# EAGLE board PCB_2D (EAGLE 9.7.0)
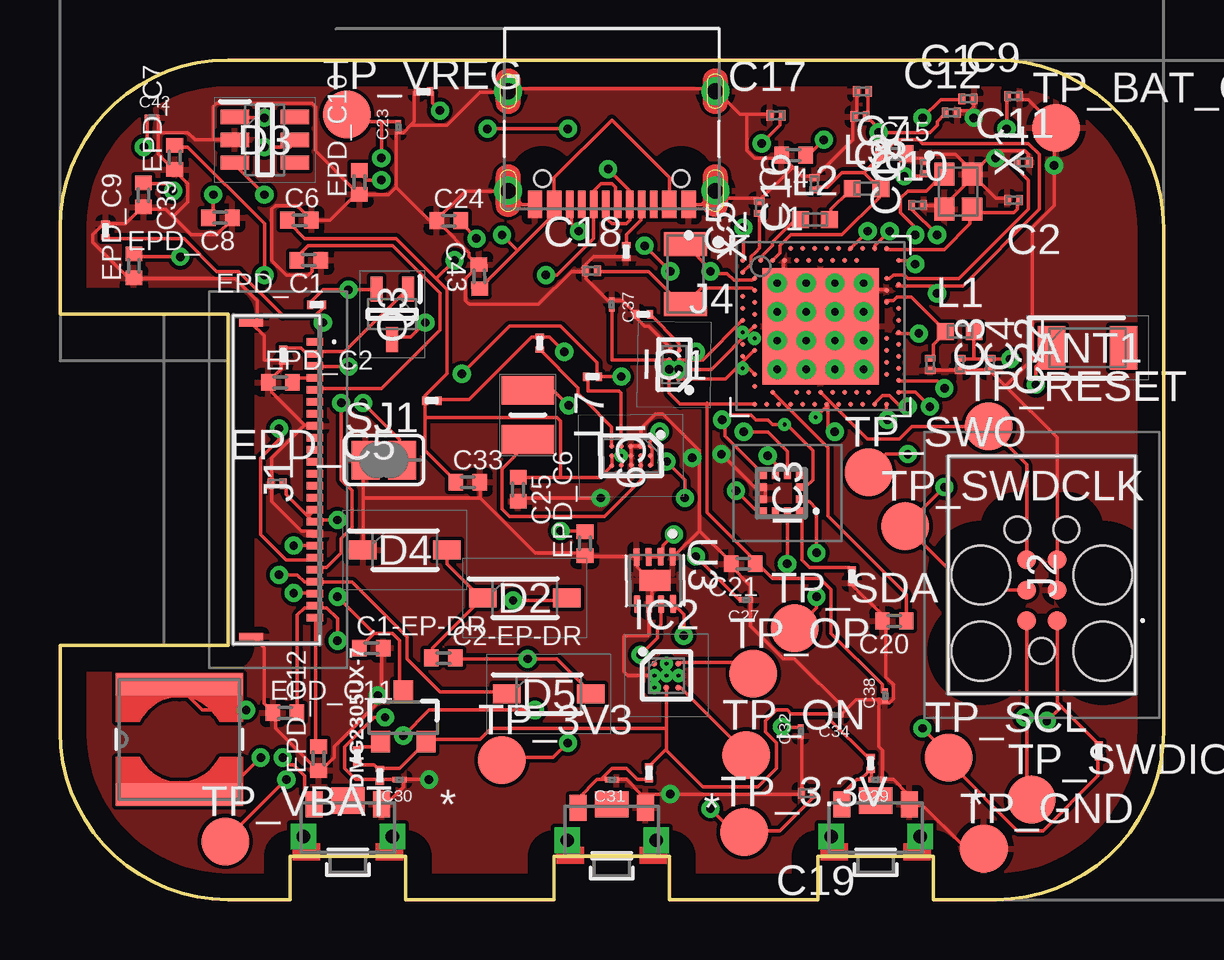
[diagram p0: board, top side]
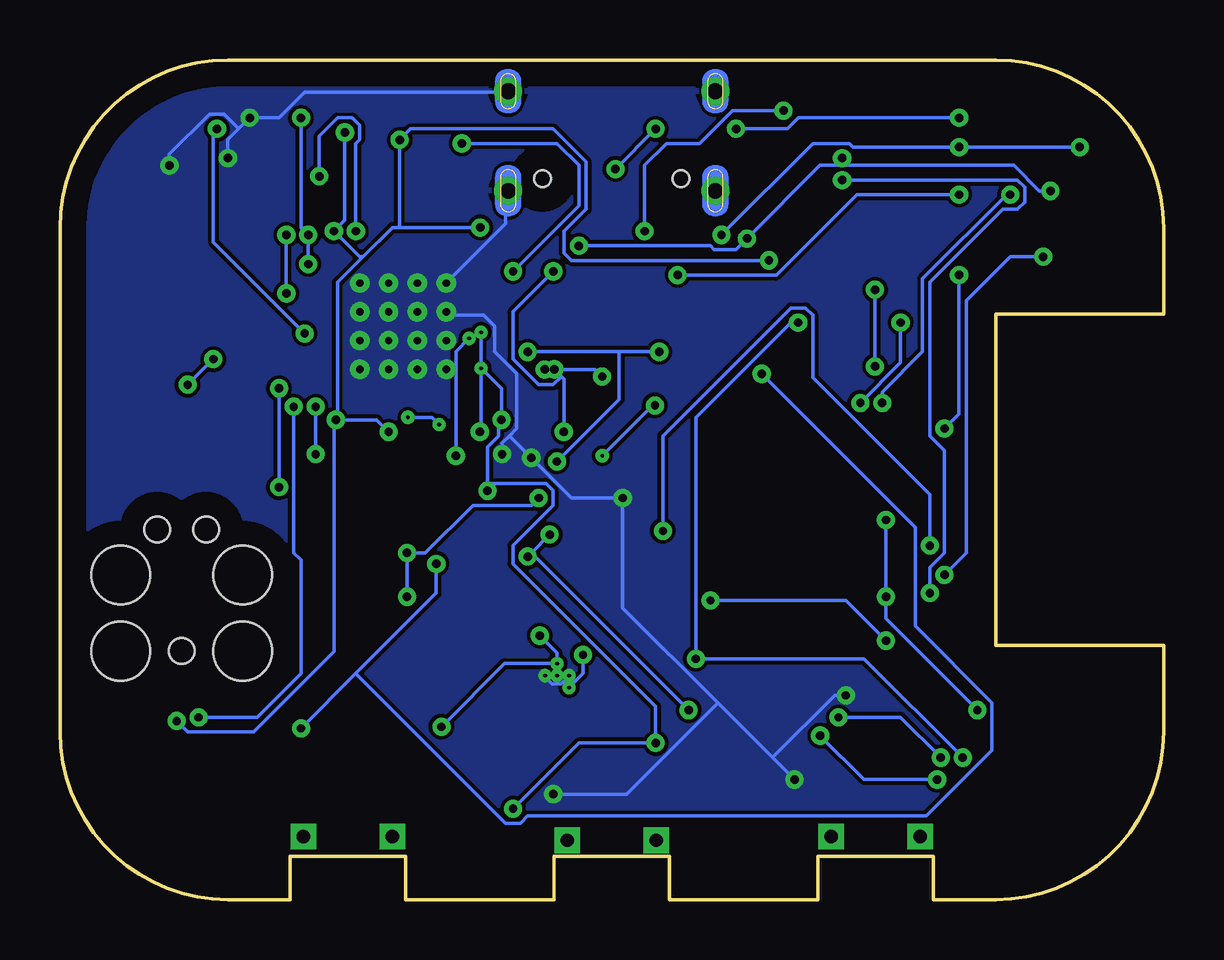
[diagram p1: board, bottom side, seen from below]

Size 46 x 35 mm. Coordinates in mm from the lower left corner, seen from the top.
Outline: 46,7 46,28
Outline: 46,28 arc90 39,35 37.7,35 7,35 arc90 0,28 0,24.4 7,24.4 7,10.6 0,10.6 0,7 arc90 7,0 9.6,0 9.6,1.8 14.4,1.8 14.4,0 20.6,0 20.6,1.8 25.4,1.8 25.4,0 31.6,0 31.6,1.8 36.4,1.8 36.4,0 37.7,0 39,0 arc90 46,7
Outline: 46,28 46,7
Copper layers (1*16): Top 0.035mm / dielectric 1.5mm / Bottom 0.035mm
Design rules "jlcpcb-2layers.dru": minimum track width 6mil, minimum drill 0.35mm, track to track 6mil, track to pad 6mil, pad to pad 6mil, via to via 6mil, smd to smd 6mil, copper to edge 40mil, drill to drill 6mil, minimum pad ring 10mil, minimum via ring 8mil, stop-mask expansion 4mil, vias tented up to drill 9999mil, thermal gap 10mil

## Footprints (pad centres in the part's own frame; a part is rotated, then mirrored left to right if it is on the bottom)
2450AT18B100E_ANTC3216X140N = smd 1.15 x 1.8: 1 -1.5,0; 2 1.5,0
NORDIC_NRF_3_RESC0201_L = smd 0.28 x 0.43: 1 -0.255,0; 2 0.255,0
PERFECT_0402_0402 = smd 0.6 x 0.7: 1 -0.5,0; 2 0.5,0
GRM011R60J152KE01L_2_CAPC0201X13N = smd 0.22 x 0.23: 1 -0.185,0; 2 0.185,0
ESP32_C6_LIBRARY_5_SOD3716X135N = smd 1.15 x 0.8: 1 -1.75,0; 2 1.75,0
ESP32_C6_LIBRARY_3_SOT95P280X145-6N = smd 1.2 x 0.6: 1 -1.25,0.95; 2 -1.25,0; 3 -1.25,-0.95; 4 1.25,-0.95; 5 1.25,0; 6 1.25,0.95
ESP32_C6_LIBRARY_4_ESP32_C6_LIBRARY_4_ESP32_C6_LIBRARY_4_ESP32_C6_LIBRARY_4_ESP32_WROVER_SPARKFUN-DISCRETESEMI_SOT23-3 = smd 0.8 x 0.9: 1 -0.95,-1; 2 0.95,-1; 3 0,1.1
BQ25180YBGR_BGA8C40P2X4_100X155X50 = smd 0.2 x 0.2: A1 -0.2,0.6; A2 0.2,0.6; B1 -0.2,0.2; B2 0.2,0.2; C1 -0.2,-0.2; C2 0.2,-0.2; D1 -0.2,-0.6; D2 0.2,-0.6
DRV2605YZFR_BGA9C50P3X3_144X144X62 = smd 0.25 x 0.25: A1 -0.5,0.5; A2 0,0.5; A3 0.5,0.5; B1 -0.5,0; B2 0,0; B3 0.5,0; C1 -0.5,-0.5; C2 0,-0.5; C3 0.5,-0.5
BMA423_BMA423 = smd 0.3 x 0.35: 1 -0.75,-0.775; 2 -0.25,-0.775; 3 0.25,-0.775; 4 0.75,-0.775; 7 0.75,0.775; 8 0.25,0.775; 9 -0.25,0.775; 10 -0.75,0.775 | smd 0.35 x 0.3: 5 0.775,-0.25; 6 0.775,0.25; 11 -0.775,0.25; 12 -0.775,-0.25
RT6160AWSC_BGA15C40P3X5_140X230X60 = smd 0.216 x 0.216: A1 -0.4,0.8; A2 0,0.8; A3 0.4,0.8; B1 -0.4,0.4; B2 0,0.4; B3 0.4,0.4; C1 -0.4,0; C2 0,0; C3 0.4,0; D1 -0.4,-0.4; D2 0,-0.4; D3 0.4,-0.4; E1 -0.4,-0.8; E2 0,-0.8; E3 0.4,-0.8
503480-2400_5034802400 = smd 0.3 x 0.7: 1 -5.75,1.525; 2 -5.25,1.525; 3 -4.75,1.525; 4 -4.25,1.525; 5 -3.75,1.525; 6 -3.25,1.525; 7 -2.75,1.525; 8 -2.25,1.525; 9 -1.75,1.525; 10 -1.25,1.525; 11 -0.75,1.525; 12 -0.25,1.525; 13 0.25,1.525; 14 0.75,1.525; 15 1.25,1.525; 16 1.75,1.525; 17 2.25,1.525; 18 2.75,1.525; 19 3.25,1.525; 20 3.75,1.525; 21 4.25,1.525; 22 4.75,1.525; 23 5.25,1.525; 24 5.75,1.525 | smd 0.3 x 1: MP1 -6.54,-1.125; MP2 6.54,-1.125
TC2030-IDC_TC2030IDC = smd 0.783 x 0.783: 1 -0.953,-0.635; 2 -0.953,0.635; 3 0.317,-0.635; 4 0.317,0.635; 5 1.588,-0.635; 6 1.588,0.635 | hole 2.451: -2.223,-2.54; -2.223,2.54; 0.952,-2.54; 0.952,2.54 | hole 1.067: -2.223,0; 2.857,-1.016; 2.857,1.016
KH-TYPE-C-16P_KINGHELM_KH-TYPE-C-16P = smd 0.6 x 1.15: A1_B12 -3.2,4.725; A4_B9 -2.4,4.725; A9_B4 2.4,4.725; A12_B1 3.2,4.725 | smd 0.3 x 1.15: A5 -1.25,4.725; A6 -0.25,4.725; A7 0.25,4.725; A8 1.25,4.725; B5 1.75,4.725; B6 0.75,4.725; B7 -0.75,4.725; B8 -1.75,4.725 | drill 0.65 pad 1.05: SH1 -4.32,0; SH2 4.32,0; SH3 -4.32,4.15; SH4 4.32,4.15 | hole 0.7: -2.89,3.65; 2.89,3.65
NORDIC_NRF_2_RESC0402_M = smd 0.7 x 0.7: 1 -0.6,0; 2 0.6,0
ESP32_C6_LIBRARY_2_IND_4828-WE-TPC_WRE = smd 0.9 x 5.3: 1 -2.286,0; 2 2.286,0
MLP2016SR47MT0S1_INDC2016X100N = smd 1.2 x 2.2: 1 -1.028,0; 2 1.028,0
ESP32_C6_LIBRARY_6_SOT65P210X110-3N = smd 1.05 x 0.5: 1 -1.05,0.65; 2 -1.05,-0.65; 3 1.05,0
ERA-1AEB3401C_0201 = smd 0.35 x 0.25: 1 0,0.275; 2 0,-0.275
CPF0201D7K68C1_0201 = smd 0.35 x 0.25: 1 0,0.275; 2 0,-0.275
ESP32_C6_LIBRARY_7_JUMPER_SJ = smd 1.168 x 1.6: 1 -0.762,0; 2 0.762,0
2025-10-22_07-23-44_LIBRARY_SW_EVP-AKE31A_PAN = smd 0.711 x 1.092: 1 -1.4,-0.972; 2 1.4,-0.972 | drill 0.559 pad 0.914 square: 3 -1.848,0.381; 4 1.848,0.381 | smd 1.397 x 1.092: 5 0,-1.124
HECTOR_WATCH_1_TP20R = smd 2 x 2: TP 0,0
NORDIC_NRF_4_AQFN50P700X700X85_HS-74N = smd 4.85 x 4.85: P$74 0,0 | drill 0.3 pad 0.6: P$75 -1.8,1.8; P$76 -0.6,1.8; P$77 0.6,1.8; P$78 1.8,1.8; P$79 -1.8,0.6; P$80 -0.6,0.6; P$81 0.6,0.6; P$82 1.8,0.6; P$83 -1.8,-0.6; P$84 -0.6,-0.6; P$85 0.6,-0.6; P$86 1.8,-0.6; P$87 -1.8,-1.8; P$88 -0.6,-1.8; P$89 0.6,-1.8; P$90 1.8,-1.8 | smd 0.2 x 0.2: P$A8 -1.25,3.25; P$A10 -0.75,3.25; P$A12 -0.25,3.25; P$A14 0.25,3.25; P$A16 0.75,3.25; P$A18 1.25,3.25; P$A20 1.75,3.25; P$A22 2.25,3.25; P$A23 2.75,3.25; P$AA24 3.25,-2.25; P$AB2 -2.75,-2.5; P$AC5 -2,-2.75; P$AC9 -1,-2.75; P$AC11 -0.5,-2.75; P$AC13 0,-2.75; P$AC15 0.5,-2.75; P$AC17 1,-2.75; P$AC19 1.5,-2.75; P$AC21 2,-2.75; P$AC24 3.25,-2.75; P$AD2 -2.75,-3.25; P$AD4 -2.25,-3.25; P$AD6 -1.75,-3.25; P$AD8 -1.25,-3.25; P$AD10 -0.75,-3.25; P$AD12 -0.25,-3.25; P$AD14 0.25,-3.25; P$AD16 0.75,-3.25; P$AD18 1.25,-3.25; P$AD20 1.75,-3.25; P$AD22 2.25,-3.25; P$AD23 2.75,-3.25; P$B1 -3.25,2.75; P$B3 -2.5,2.75; P$B5 -2,2.75; P$B7 -1.5,2.75; P$B9 -1,2.75; P$B11 -0.5,2.75; P$B13 0,2.75; P$B15 0.5,2.75; P$B17 1,2.75; P$B19 1.5,2.75; P$B24 3.25,2.75; P$C1 -3.25,2.25; P$D2 -2.75,2; P$D23 2.75,2; P$E24 3.25,1.75; P$F2 -2.75,1.5; P$F23 2.75,1.5; P$G1 -3.25,1.25; P$H2 -2.75,1; P$H23 2.75,1; P$J1 -3.25,0.75; P$J24 3.25,0.75; P$K2 -2.75,0.5; P$L1 -3.25,0.25; P$L24 3.25,0.25; P$M2 -2.75,0; P$N1 -3.25,-0.25; P$N24 3.25,-0.25; P$P2 -2.75,-0.5; P$P23 2.75,-0.5; P$R1 -3.25,-0.75; P$R24 3.25,-0.75; P$T2 -2.75,-1; P$T23 2.75,-1; P$U1 -3.25,-1.25; P$U24 3.25,-1.25; P$V23 2.75,-1.5; P$W1 -3.25,-1.75; P$W24 3.25,-1.75; P$Y2 -2.75,-2; P$Y23 2.75,-2
ESP32_C6_LIBRARY_SON50P200X200X80-9N = smd 0.76 x 0.27: 1 -0.985,0.75; 2 -0.985,0.25; 3 -0.985,-0.25; 4 -0.985,-0.75; 5 0.985,-0.75; 6 0.985,-0.25; 7 0.985,0.25; 8 0.985,0.75 | smd 0.9 x 1.3: 9 0,0
NORDIC_NRF_BT-XTAL_2016_N = smd 0.95 x 0.85: 1 -0.725,-0.575; 2 0.725,-0.575; 3 0.725,0.575; 4 -0.725,0.575
NORDIC_NRF_1_XTAL_3215_N = smd 1 x 1.8: 1 -1.25,0; 2 1.25,0

## Placement (x,y rotation side)
ANT1  2450AT18B100E  [2450AT18B100E_ANTC3216X140N]  42.83,23 0 top
C1  12pF  [NORDIC_NRF_3_RESC0201_L]  37.85,33.38 0 top
C1-EP-DR  10uF  [PERFECT_0402_0402]  12.98,10.48 0 top
C2  12pF  [NORDIC_NRF_3_RESC0201_L]  39.75,29.16 180 top
C2-EP-DR  4.7uF/25V  [PERFECT_0402_0402]  15.98,10.07 0 top
C3  1pF  [NORDIC_NRF_3_RESC0201_L]  36.27,22.31 270 top
C4  1pF  [NORDIC_NRF_3_RESC0201_L]  37.52,22.31 270 top
C5  100nF  [NORDIC_NRF_3_RESC0201_L]  29.15,28.86 90 top
C6  4.7µF  [PERFECT_0402_0402]  9.98,28.32 0 top
C7  100nF  [NORDIC_NRF_3_RESC0201_L]  33.45,33.69 180 top
C8  100nF  [NORDIC_NRF_3_RESC0201_L]  33.35,32.64 180 top
C9  820pF  [NORDIC_NRF_3_RESC0201_L]  39.75,33.49 0 top
C10  N.C.  [NORDIC_NRF_3_RESC0201_L]  35.75,28.95 0 top
C11  100pF  [NORDIC_NRF_3_RESC0201_L]  40.15,30.73 0 top
C12  100nF  [NORDIC_NRF_3_RESC0201_L]  37.15,32.8 0 top
C13  N.C.  [NORDIC_NRF_3_RESC0201_L]  36.05,30.52 90 top
C14  4.7µF  [PERFECT_0402_0402]  30.58,31.03 180 top
C15  1.0µF  [PERFECT_0402_0402]  34.78,31.09 0 top
C16  47nF  [NORDIC_NRF_3_RESC0201_L]  31.45,29.84 90 top
C17  12pF  [NORDIC_NRF_3_RESC0201_L]  29.85,32.69 0 top
C18  12pF  [NORDIC_NRF_3_RESC0201_L]  22.15,26.21 0 top
C19  100nF  [NORDIC_NRF_3_RESC0201_L]  31.15,4.44 180 top
C20  4.7µF  [PERFECT_0402_0402]  34.78,11.61 180 top
C21  4.7µF  [PERFECT_0402_0402]  28.48,14 180 top
C22  N.C.  [NORDIC_NRF_3_RESC0201_L]  38.77,22.31 270 top
C23  0.1uF  [GRM011R60J152KE01L_2_CAPC0201X13N]  14.1,32.2 90 top
C24  10uF  [PERFECT_0402_0402]  16.2,28.3 0 top
C25  22uF  [PERFECT_0402_0402]  19.1,17.1 270 top
C27  0.1uF  [GRM011R60J152KE01L_2_CAPC0201X13N]  28.6,12.5 180 top
C29  1uF  [GRM011R60J152KE01L_2_CAPC0201X13N]  33.99,5 180 top
C30  1uF  [GRM011R60J152KE01L_2_CAPC0201X13N]  14.15,5 180 top
C31  1uF  [GRM011R60J152KE01L_2_CAPC0201X13N]  23.01,5 180 top
C32  1uF  [GRM011R60J152KE01L_2_CAPC0201X13N]  30.87,7 90 top
C33  22uF  [PERFECT_0402_0402]  17,17.4 0 top
C34  0.1uF  [GRM011R60J152KE01L_2_CAPC0201X13N]  32.37,7.7 180 top
C37  1uF  [GRM011R60J152KE01L_2_CAPC0201X13N]  23,24.8 270 top
C38  1uF  [GRM011R60J152KE01L_2_CAPC0201X13N]  34.39,8.5 90 top
C39  10uF  [PERFECT_0402_0402]  3.48,29.37 270 top
C42  0.1uF  [GRM011R60J152KE01L_2_CAPC0201X13N]  3.83,32.6 0 top
C43  4.7uF  [PERFECT_0402_0402]  17.48,25.97 91.7 top
D2  MBR0530  [ESP32_C6_LIBRARY_5_SOD3716X135N]  19.38,12.57 0 top
D3  USBLC6-2SC6Y  [ESP32_C6_LIBRARY_3_SOT95P280X145-6N]  8.54,31.67 0 top
D4  MBR0530  [ESP32_C6_LIBRARY_5_SOD3716X135N]  14.38,14.57 0 top
D5  MBR0530  [ESP32_C6_LIBRARY_5_SOD3716X135N]  20.38,8.57 0 top
DMG2305UX-7  20V/4.2A/52mΩ/1.4W  [ESP32_C6_LIBRARY_4_ESP32_C6_LIBRARY_4_ESP32_C6_LIBRARY_4_ESP32_C6_LIBRARY_4_ESP32_WROVER_SPARKFUN-DISCRETESEMI_SOT23-3]  14.31,7.58 0 top
EPD_C1  1uF/50V  [PERFECT_0402_0402]  10.38,26.65 180 top
EPD_C2  1uF/50V  [PERFECT_0402_0402]  9.18,21.56 0 top
EPD_C5  0.1uF/50V  [NORDIC_NRF_3_RESC0201_L]  9.05,17.33 0 top
EPD_C6  1uF/50V  [PERFECT_0402_0402]  21.88,14.84 90 top
EPD_C7  1uF/50V  [PERFECT_0402_0402]  4.78,30.93 90 top
EPD_C8  1uF/50V  [PERFECT_0402_0402]  6.68,28.42 180 top
EPD_C9  1uF/50V  [PERFECT_0402_0402]  3.08,26.41 90 top
EPD_C10  1uF/50V  [PERFECT_0402_0402]  12.48,29.9 90 top
EPD_C11  1uF/50V  [PERFECT_0402_0402]  9.38,7.79 0 top
EPD_C12  1uF/50V  [PERFECT_0402_0402]  10.78,5.88 90 top
IC1  BQ25180YBGR  [BQ25180YBGR_BGA8C40P2X4_100X155X50]  25.6,22.3 179.1 top
IC2  DRV2605YZFR  [DRV2605YZFR_BGA9C50P3X3_144X144X62]  25.28,9.34 0 top
IC3  BMA423  [BMA423_BMA423]  30.07,16.94 90 top
IC9  RT6160AWSC  [RT6160AWSC_BGA15C40P3X5_140X230X60]  23.8,18.5 270.7 top
J1  503480-2400  [503480-2400_5034802400]  9.1,17.5 270 top
J2  TC2030-IDC  [TC2030-IDC_TC2030IDC]  40.93,12.58 90 top
J4  KH-TYPE-C-16P  [KH-TYPE-C-16P_KINGHELM_KH-TYPE-C-16P]  23,33.7 180 top
L1  3.9nH  [NORDIC_NRF_2_RESC0402_M]  37.51,23.68 0 top
L2  10μH  [NORDIC_NRF_2_RESC0402_M]  31.47,28.34 0 top
L3  15nH  [NORDIC_NRF_2_RESC0402_M]  33.62,29.64 0 top
L5  68uH  [ESP32_C6_LIBRARY_2_IND_4828-WE-TPC_WRE]  4.98,6.67 90 top
L7  FTC252012SR47MBCA  [MLP2016SR47MT0S1_INDC2016X100N]  19.5,20.2 90 top
Q3  SI1308EDL-T1-GE3  [ESP32_C6_LIBRARY_6_SOT65P210X110-3N]  13.85,24.4 270 top
R1_EP_DR  0.47  [ERA-1AEB3401C_0201]  10.7,24.8 270 top
R1_USB  5K1  [ERA-1AEB3401C_0201]  23.6,27.01 180 top
R2  0  [CPF0201D7K68C1_0201]  20,23.2 0 top
R2_EP_DR  10K  [ERA-1AEB3401C_0201]  9.3,22.7 180 top
R2_USB  5K1  [ERA-1AEB3401C_0201]  15.15,33.68 270 top
R3  0  [CPF0201D7K68C1_0201]  33.01,13.48 180 top
R4  0  [CPF0201D7K68C1_0201]  22.2,21.8 270 top
R5  10k  [ERA-1AEB3401C_0201]  13.33,5.18 180 top
R7  10k  [ERA-1AEB3401C_0201]  33.79,5.68 180 top
R8  10k  [ERA-1AEB3401C_0201]  24.55,5.28 180 top
R9  10K  [CPF0201D7K68C1_0201]  24.31,24.4 90 top
R17  3K3  [CPF0201D7K68C1_0201]  43.3,6.2 0 top
R18  3K3  [CPF0201D7K68C1_0201]  15.5,20.8 90 top
R_PWR_EPD  10K  [ERA-1AEB3401C_0201]  12.39,5.98 0 top
R_TYPE_SEL  2.2  [ERA-1AEB3401C_0201]  1.9,27.9 0 top
SJ1  [ESP32_C6_LIBRARY_7_JUMPER_SJ]  13.5,18.32 0 top
SW_DN  2025-10-22_07-23-44_LIBRARY_EVP-AKE31ASW_EVP-AKE31A_PAN  [2025-10-22_07-23-44_LIBRARY_SW_EVP-AKE31A_PAN]  34,3 180 top
SW_ENT  2025-10-22_07-23-44_LIBRARY_EVP-AKE31ASW_EVP-AKE31A_PAN  [2025-10-22_07-23-44_LIBRARY_SW_EVP-AKE31A_PAN]  23,2.85 180 top
SW_UP  2025-10-22_07-23-44_LIBRARY_EVP-AKE31ASW_EVP-AKE31A_PAN  [2025-10-22_07-23-44_LIBRARY_SW_EVP-AKE31A_PAN]  12,3 180 top
TP_3.3V  HECTOR_WATCH_1_TPTP20R  [HECTOR_WATCH_1_TP20R]  28.52,2.82 0 top
TP_3V3  HECTOR_WATCH_1_TPTP20R  [HECTOR_WATCH_1_TP20R]  18.42,5.82 0 top
TP_BAT_GND  HECTOR_WATCH_1_TPTP20R  [HECTOR_WATCH_1_TP20R]  41.53,32.17 0 top
TP_GND  HECTOR_WATCH_1_TPTP20R  [HECTOR_WATCH_1_TP20R]  38.51,2.12 0 top
TP_ON  HECTOR_WATCH_1_TPTP20R  [HECTOR_WATCH_1_TP20R]  28.6,6.02 0 top
TP_OP  HECTOR_WATCH_1_TPTP20R  [HECTOR_WATCH_1_TP20R]  28.9,9.42 0 top
TP_RESET  HECTOR_WATCH_1_TPTP20R  [HECTOR_WATCH_1_TP20R]  38.71,19.72 0 top
TP_SCL  HECTOR_WATCH_1_TPTP20R  [HECTOR_WATCH_1_TP20R]  37.04,5.92 0 top
TP_SDA  HECTOR_WATCH_1_TPTP20R  [HECTOR_WATCH_1_TP20R]  30.63,11.32 0 top
TP_SWDCLK  HECTOR_WATCH_1_TPTP20R  [HECTOR_WATCH_1_TP20R]  35.23,15.57 0 top
TP_SWDIO  HECTOR_WATCH_1_TPTP20R  [HECTOR_WATCH_1_TP20R]  40.5,4.17 0 top
TP_SWO  HECTOR_WATCH_1_TPTP20R  [HECTOR_WATCH_1_TP20R]  33.7,17.82 0 top
TP_VBAT  HECTOR_WATCH_1_TPTP20R  [HECTOR_WATCH_1_TP20R]  6.89,2.42 0 top
TP_VREG  HECTOR_WATCH_1_TPTP20R  [HECTOR_WATCH_1_TP20R]  11.95,32.72 0 top
U1  NRF52840_QF  [NORDIC_NRF_4_AQFN50P700X700X85_HS-74N]  31.7,23.9 0 top
U3  MAX17048G+T10  [ESP32_C6_LIBRARY_SON50P200X200X80-9N]  24.8,13.3 270.5 top
X1  32MHz  [NORDIC_NRF_BT-XTAL_2016_N]  37.44,29.51 270 top
X2  32.768kHz  [NORDIC_NRF_1_XTAL_3215_N]  26.07,26.07 270 top

## Library data of the parts
ANT1 = InkTime_v5; ARROW_PART_NUMBER: 2450AT18B100E; ARROW_PRICE-STOCK: https://www.arrow.com/en/products/2450at18b100e/johanson-dielectrics?utm_currency=USD&region=nac; DESCRIPTION: Antennas 2.45GHz ANTENNA; HEIGHT: 1.4mm; MANUFACTURER_NAME: JOHANSON TECHNOLOGY; MANUFACTURER_PART_NUMBER: 2450AT18B100E; MOUSER_PART_NUMBER: 609-2450AT18B100E; MOUSER_PRICE-STOCK: https://www.mouser.co.uk/ProductDetail/Johanson-Technology/2450AT18B100E?qs=yCnrNFeXz%252Bh5MFsFIXGZGA%3D%3D
C1-C5 C7-C13 C16-C19 C22 EPD_C5 EPD_C9 = new_InkTime_v5
C1-EP-DR C2-EP-DR C6 C14 C15 C20 C21 C24 C25 C33 C39 C43 EPD_C1 EPD_C2 EPD_C6-EPD_C8 EPD_C10-EPD_C12 L1-L3 R1_EP_DR R1_USB R2 R2_EP_DR R2_USB R3-R5 R7-R9 R17 R18 R_PWR_EPD R_TYPE_SEL SJ1 TP_3.3V TP_3V3 TP_BAT_GND TP_GND TP_ON TP_OP TP_RESET TP_SCL TP_SDA TP_SWDCLK TP_SWDIO TP_SWO TP_VBAT TP_VREG U1 X1 X2 = InkTime_v5
C23 C27 C29-C32 C34 C37 C38 C42 = InkTime_v5; AVAILABILITY: In Stock; CHECK_PRICES: https://www.snapeda.com/parts/GRM011R60J152KE01L/Murata/view-part/?ref=eda; DESCRIPTION: SMD Capacitor X5R(EIA) with Capacitance: 1500pF Tol. 10%. Rated Voltage: 6.3Vdc; MF: Murata; MP: GRM011R60J152KE01L; PACKAGE: 0201 Murata; PRICE: None; SNAPEDA_LINK: https://www.snapeda.com/parts/GRM011R60J152KE01L/Murata/view-part/?ref=snap
D2 D4 D5 = InkTime_v5; AVAILABILITY: In Stock; CHECK_PRICES: https://www.snapeda.com/parts/MBR0530/Onsemi/view-part/?ref=eda; DESCRIPTION: Diode Schottky 30 V 500mA Surface Mount SOD-123; MF: ON Semiconductor; MP: MBR0530; PACKAGE: SOD-123-2 ON Semiconductor; PRICE: None; PURCHASE-URL: https://www.snapeda.com/api/url_track_click_mouser/?unipart_id=179458&manufacturer=ON Semiconductor&part_name=MBR0530&search_term=None; SNAPEDA_LINK: https://www.snapeda.com/parts/MBR0530/Onsemi/view-part/?ref=snap
D3 = InkTime_v5; AVAILABILITY: In Stock; CHECK_PRICES: https://www.snapeda.com/parts/USBLC6-2SC6Y/STMicroelectronics/view-part/?ref=eda; DESCRIPTION: 17V Clamp 5A (8/20µs) Ipp Tvs Diode Surface Mount SOT-23-6; MF: STMicroelectronics; MP: USBLC6-2SC6Y; PACKAGE: SOT-23-6 STMicroelectronics; PRICE: None; SNAPEDA_LINK: https://www.snapeda.com/parts/USBLC6-2SC6Y/STMicroelectronics/view-part/?ref=snap
DMG2305UX-7 = InkTime_v5; PROD_ID: TRAN-14388
IC1 = InkTime_v5; ARROW_PART_NUMBER: BQ25180YBGR; ARROW_PRICE-STOCK: https://www.arrow.com/en/products/bq25180ybgr/texas-instruments?utm_currency=USD&region=nac; DESCRIPTION: Charger IC Lithium Ion/Polymer, Lithium Iron Phosphate 8-DSBGA (1.6x1.1); HEIGHT: 0.5mm; MANUFACTURER_NAME: Texas Instruments; MANUFACTURER_PART_NUMBER: BQ25180YBGR; MOUSER_PART_NUMBER: 595-BQ25180YBGR; MOUSER_PRICE-STOCK: https://www.mouser.co.uk/ProductDetail/Texas-Instruments/BQ25180YBGR?qs=doiCPypUmgEWjAK%252BJAX6Tw%3D%3D
IC2 = InkTime_v5; ARROW_PART_NUMBER: DRV2605YZFR; ARROW_PRICE-STOCK: https://www.arrow.com/en/products/drv2605yzfr/texas-instruments?region=nac; DESCRIPTION: Haptic Driver for ERM/LRA with Built-In Library and Smart Loop Architecture; HEIGHT: 0.625mm; MANUFACTURER_NAME: Texas Instruments; MANUFACTURER_PART_NUMBER: DRV2605YZFR
IC3 = InkTime_v5; ARROW_PART_NUMBER: BMA423; ARROW_PRICE-STOCK: https://www.arrow.com/en/products/bma423/bosch; DESCRIPTION: Accelerometers Triaxial low-g 12bit Acceleration Sensor; HEIGHT: 1mm; MANUFACTURER_NAME: BOSCH; MANUFACTURER_PART_NUMBER: BMA423; MOUSER_PART_NUMBER: 262-BMA423; MOUSER_PRICE-STOCK: https://www.mouser.co.uk/ProductDetail/Bosch-Sensortec/BMA423?qs=HXFqYaX1Q2xC%252BSgeGoX3mg%3D%3D
IC9 = InkTime_v5; DESCRIPTION: Buck-Boost Regulator Positive Output Step-Up/Step-Down I2C DC-DC Controller IC 15-WL-CSP (BSC) (1.4x2.3); HEIGHT: 0.6mm; MANUFACTURER_NAME: RICHTEK; MANUFACTURER_PART_NUMBER: RT6160AWSC; MOUSER_PART_NUMBER: 835-RT6160AWSC; MOUSER_PRICE-STOCK: https://www.mouser.co.uk/ProductDetail/Richtek/RT6160AWSC?qs=amGC7iS6iy%2FLd9PSoixZXQ%3D%3D
J1 = InkTime_v5; DESCRIPTION: FFC & FPC Connectors 0.5mm FPC RA SMT Dual Contact 24Ckt; HEIGHT: 1.87mm; MANUFACTURER_NAME: Molex; MANUFACTURER_PART_NUMBER: 503480-2400; MOUSER_PART_NUMBER: 538-503480-2400; MOUSER_PRICE-STOCK: https://www.mouser.co.uk/ProductDetail/Molex/503480-2400?qs=OAhjpuo3Vu7efIoxFh9AOw%3D%3D
J2 = InkTime_v5; DESCRIPTION: CABLE ADAPTER 6 POS; HEIGHT: 19mm; MANUFACTURER_NAME: Tag Connect; MANUFACTURER_PART_NUMBER: TC2030-IDC
J4 = InkTime_v5; AVAILABILITY: Not in stock; CHECK_PRICES: https://www.snapeda.com/parts/KH-TYPE-C-16P/Kinghelm/view-part/?ref=eda; MF: kinghelm; MP: KH-TYPE-C-16P; PACKAGE: None; PRICE: None; SNAPEDA_LINK: https://www.snapeda.com/parts/KH-TYPE-C-16P/Kinghelm/view-part/?ref=snap
L5 = InkTime_v5; COPYRIGHT: Copyright (C) 2024 Ultra Librarian. All rights reserved.; MANUFACTURER_PART_NUMBER: 744043680; MFR_NAME: Wurth Electronics
L7 = InkTime_v5; DESCRIPTION: SMD / SMT Inductors (Coils), L=0.47?H, L x W x T :; HEIGHT: 1mm; JLCPCB: https://jlcpcb.com/partdetail/6763488-FTC252012SR47MBCA/C5832368; MANUFACTURER_NAME: TDK; MANUFACTURER_PART_NUMBER: FTC252012SR47MBCA
Q3 = InkTime_v5; AVAILABILITY: In Stock; CHECK_PRICES: https://www.snapeda.com/parts/SI1308EDL-T1-GE3/Vishay+Siliconix/view-part/?ref=eda; DESCRIPTION: Si1308EDL-T1-GE3 N-channel MOSFET Transistor, 1.5 A, 30 V, 3-Pin SC-70 | Siliconix / Vishay SI1308EDL-T1-GE3; MF: Vishay Siliconix; MP: SI1308EDL-T1-GE3; PACKAGE: SOT-323 Vishay Semiconductor; PRICE: None; PURCHASE-URL: https://www.snapeda.com/api/url_track_click_mouser/?unipart_id=274603&manufacturer=Vishay Siliconix&part_name=SI1308EDL-T1-GE3&search_term=None; SNAPEDA_LINK: https://www.snapeda.com/parts/SI1308EDL-T1-GE3/Vishay+Siliconix/view-part/?ref=snap
SW_DN SW_ENT SW_UP = InkTime_v5; COPYRIGHT: Copyright (C) 2025 Ultra Librarian. All rights reserved.; DIGI-KEY_PART_NUMBER_1: P123437TR-ND; DIGI-KEY_PART_NUMBER_2: P123437CT-ND; DIGI-KEY_PART_NUMBER_3: P123437DKR-ND; MANUFACTURER_NAME: Panasonic; MANUFACTURER_PART_NUMBER: EVP-AKE31A
U3 = InkTime_v5; AVAILABILITY: In Stock; CHECK_PRICES: https://www.snapeda.com/parts/MAX17048G+T10/Analog+Devices/view-part/?ref=eda; DESCRIPTION: 3µA 1-Cell/2-Cell Fuel Gauge with ModelGauge; MF: Analog Devices; MP: MAX17048G+T10; PACKAGE: TDFN-8 Maxim; PRICE: None; PURCHASE-URL: https://www.snapeda.com/api/url_track_click_mouser/?unipart_id=329239&manufacturer=Analog Devices&part_name=MAX17048G+T10&search_term=None; SNAPEDA_LINK: https://www.snapeda.com/parts/MAX17048G+T10/Analog+Devices/view-part/?ref=snap

## Nets
3V3/1.7D: C34.2 DMG2305UX-7.2 IC2.C2 R5.2 R7.2 R8.2 R_PWR_EPD.2
3V3/2.4A: C6.1 C7.1 C8.1 C12.1 C14.1 C19.1 C25.1 C33.1 IC3.3 IC3.7 IC3.10 IC9.E2 IC9.E3 J2.1 R17.1 R18.1 TP_3.3V.TP TP_3V3.TP U1.P$A22 U1.P$AD14 U1.P$AD23 U1.P$B1 U1.P$W1 U1.P$Y2
ALERT/1.6C: U3.5
ALERT/2.5C: U1.P$J24
D+/1.5D: D3.4
D+/2.7D: U1.P$AD6
D-/1.5D: D3.6
D-/2.7D: U1.P$AD4
DEC4_6: C10.1 C15.1 C16.1 L3.2 U1.P$B5 U1.P$E24
DN: D3.1 J4.A7 J4.B7
DP: D3.3 J4.A6 J4.B6
EPD_3V3: C1-EP-DR.1 DMG2305UX-7.3 EPD_C5.2 J1.15 J1.16 L5.2
EPD_BUSY/1.5D: J1.9
EPD_BUSY/2.2D: U1.P$AD12
EPD_CS/1.4C: J1.12
EPD_CS/2.2D: U1.P$K2
EPD_DC/1.5D: J1.11
EPD_DC/2.2D: U1.P$AD10
EPD_RST/1.5D: J1.10
EPD_RST/2.2D: U1.P$AC11
GDR: J1.2 Q3.1 R2_EP_DR.2
GND: C1-EP-DR.2 C1.2 C2.2 C3.2 C4.2 C5.2 C6.2 C7.2 C8.2 C9.2 C10.2 C11.2 C12.2 C13.2 C14.2 C15.2 C16.2 C17.1 C18.1 C19.2 C20.2 C21.2 C22.2 C23.1 C24.1 C25.2 C27.1 C29.1 C30.1 C31.1 C32.1 C33.2 C34.1 C37.1 C38.1 C39.2 C42.2 C43.2 D3.2 D4.1 EPD_C1.1 EPD_C2.1 EPD_C5.1 EPD_C6.1 EPD_C7.1 EPD_C8.1 EPD_C9.1 EPD_C10.1 EPD_C11.1 EPD_C12.1 IC1.D2 IC2.B1 IC2.B3 IC3.8 IC3.9 IC9.B1 IC9.C1 IC9.C2 IC9.C3 J1.8 J1.17 J1.MP1 J1.MP2 J2.3 J2.5 J4.A1_B12 J4.A12_B1 J4.SH1 J4.SH2 J4.SH3 J4.SH4 R1_USB.1 R2_EP_DR.1 R2_USB.2 R3.1 R9.1 R_TYPE_SEL.1 SJ1.1 SW_DN.1 SW_ENT.1 SW_UP.1 TP_BAT_GND.TP TP_GND.TP U1.P$74 U1.P$75 U1.P$76 U1.P$77 U1.P$78 U1.P$79 U1.P$80 U1.P$81 U1.P$82 U1.P$83 U1.P$84 U1.P$85 U1.P$86 U1.P$87 U1.P$88 U1.P$89 U1.P$90 U1.P$B7 U1.P$F23 U3.1 U3.4 U3.6 U3.9 X1.2 X1.4
HAPTIC_EN/1.4C: IC2.A1
HAPTIC_EN/2.6A: U1.P$U1
IMU_INT1: IC3.5 U1.P$N1
IMU_INT2: IC3.6 U1.P$P2
LX1: IC9.B2 IC9.B3 L7.1
LX2: IC9.D2 IC9.D3 L7.2
MOSI/1.5B: J1.14
MOSI/2.2D: U1.P$B13
N$1: C5.1 U1.P$C1
N$2: IC1.D1 R9.2
N$3: C20.1 U1.P$AC5
N$4: L2.1 U1.P$B3
N$5: C1.1 U1.P$B24 X1.1
N$6: IC9.D1 R4.2
N$7: C13.1 U1.P$A18
N$8: IC9.E1 R2.2
N$9: L2.2 L3.1
N$10: IC3.1 R3.2
N$11: C9.1 U1.P$N24
N$12: ANT1.1 C4.1 C22.1 L1.2
N$13: C3.1 L1.1 U1.P$H23
N$14: C2.1 U1.P$A23 X1.3
N$15: C11.1 U1.P$D23
N$16: C2-EP-DR.2 D5.2 L5.1 Q3.3
N$17: C2-EP-DR.1 D2.1 D4.2
N$18: EPD_C2.2 J1.4
N$19: R1_EP_DR.1 R_TYPE_SEL.2 SJ1.2
N$20: EPD_C1.2 J1.5
N$21: EPD_C6.2 J1.18
N$22: EPD_C7.2 J1.19
N$23: EPD_C8.2 J1.20
N$24: J4.A5 R1_USB.2
N$25: EPD_C10.2 J1.22
N$26: C32.2 IC2.A2
N$27: EPD_C12.2 J1.24
N$34: J4.B5 R2_USB.1
OUT+: IC2.A3 TP_OP.TP
OUT-: IC2.C3 TP_ON.TP
P0.00/XL1: C17.2 U1.P$D2 X2.1
P0.01/XL2: C18.2 U1.P$F2 X2.2
P0.04: U1.P$J1
P0.09: U1.P$L24
P0.13/1.5D: C30.2 R5.1 SW_UP.2
P0.13/2.6C: U1.P$AD8
P0.14/1.5D: C31.2 R8.1 SW_ENT.2
P0.14/2.7C: U1.P$AC9
P0.19: U1.P$AC15
P0.20: U1.P$AD16
P0.21: U1.P$AC17
P0.22: U1.P$AD18
P0.23: U1.P$AC19
P0.24: U1.P$AD20
P0.25: U1.P$AC21
P0.26: U1.P$G1
P0.27: U1.P$H2
P0.28: U1.P$B11
P0.29: U1.P$A10
P0.30: U1.P$B9
P0.31: U1.P$A8
P1.01/1.6C: DMG2305UX-7.1 R_PWR_EPD.1
P1.01/2.4B: U1.P$Y23
P1.02/1.6C: C29.2 R7.1 SW_DN.2
P1.02/2.8C: U1.P$W24
P1.03: U1.P$V23
P1.04: U1.P$U24
P1.05: U1.P$T23
P1.06: U1.P$R24
P1.07: U1.P$P23
P1.09: U1.P$R1
P1.10: U1.P$A20
P1.11: U1.P$B19
P1.12: U1.P$B17
P1.13: U1.P$A16
P1.14: U1.P$B15
P1.15: U1.P$A14
PMIC_INT: IC1.A1 U1.P$T2
PREVGH: D5.1 EPD_C9.2 J1.21
PREVGL: D2.2 EPD_C11.2 J1.23
RESE: J1.3 Q3.2 R1_EP_DR.2
RESET: J2.6 TP_RESET.TP U1.P$AC13
SCK/1.5B: J1.13
SCK/2.2D: U1.P$A12
SCL/1.4C: IC2.C1 U3.7
SCL/2.4C: IC1.B1 IC3.12 R4.1 R17.2 TP_SCL.TP U1.P$M2
SDA/1.4C: IC2.B2 U3.8
SDA/2.4C: IC1.C1 IC3.2 R2.1 R18.2 TP_SDA.TP U1.P$L1
SWDCLK: J2.4 TP_SWDCLK.TP U1.P$AA24
SWDIO: J2.2 TP_SWDIO.TP U1.P$AC24
SWO: TP_SWO.TP U1.P$AD22
VBAT/1.2A: C27.2 TP_VBAT.TP U3.2 U3.3
VBAT/2.5C: C37.2 IC1.C2
VBUS/1.5D: C42.1 C43.1 D3.5 J4.A4_B9 J4.A9_B4
VBUS/2.6D: C21.1 C38.2 IC1.A2 U1.P$AD2
VREG: C23.2 C24.2 C39.1 IC1.B2 IC9.A1 IC9.A2 IC9.A3 TP_VREG.TP

## Tracks (layer width: path | path; a pad name or v marks a point on that pad's centre or on a via)
3V3/1.7D
  Top 0.152: IC2.C2 25.28,7.14 | 25.28,7.14 25.28,6.29 | 25.28,6.29 R8.2 | R_PWR_EPD.2 12.48,5.61 13.09,5.61 13.25,5.46 R5.2 13.4,5.46 14.16,5.46 15.23,6.53 DMG2305UX-7.2 15.38,6.68 17.51,6.68 17.97,7.14 25.28,7.14 | R7.2 33.67,5.92 32.14,7.44 32.14,7.59 C34.2 32.14,7.75 30.47,7.75 30.32,7.9 29.86,7.9 29.4,7.44 29.4,6.98 29.86,6.53 29.86,5.46 29.1,4.7 26.81,4.7 25.29,6.22 25.28,6.29 | 25.28,7.14 25.29,7.14 25.28,7.14
3V3/2.4A  (via drill 0.15, 0.35)
  Top 0.152: 31.44,4.44 C19.1 31.38,4.39 31.38,4.24 30.01,2.87 28.64,2.87 TP_3.3V.TP 28.49,2.87 28.03,2.87 v27.12,3.78 | R17.1 41.73,8.04 | 41.73,8.04 41.56,8.21 J2.1 | 32,20.6 U1.P$AD14 | 32,20.6 32,19.5 v32.3,19.5 | v34.5,20 34.45,20.05 U1.P$AD23 | C25.1 20.87,17.6 | 20.87,17.6 22.52,17.6 IC9.E3 IC9.E2 | 32,20.6 31.95,20.55 v31.5,20.1 | U1.P$W1 28.7,22.15 U1.P$Y2 | 15.23,20.09 15.23,18.72 16.45,17.5 C33.1 | 15.23,20.09 15.23,20.7 R18.1 15.23,20.85 15.23,21 16.14,21.92 16.14,25.43 15.68,25.88 | 15.68,25.88 14.01,27.56 10.2,27.56 9.59,28.17 C6.1 | 15.23,20.09 20.71,20.09 20.87,19.94 20.87,17.65 20.87,17.6 | C7.1 33.67,33.65 33.67,32.74 C8.1 33.67,32.59 34.28,31.98 | 34.28,31.98 36.26,31.98 36.56,32.28 36.56,32.44 36.87,32.74 C12.1 | v28.49,28.02 28.49,26.64 U1.P$B1 | v34.58,27.86 33.97,27.25 33.97,27.1 U1.P$A22 | v28.18,17.04 28.94,16.28 29.25,16.28 IC3.10 | IC3.3 30.93,17.2 31.08,17.2 31.38,17.5 31.38,18.72 30.32,19.79 v30.2,19.8 29.7,19.8 29.5,20 29,20 28.8,20.2 27.8,20.2 v27.6,20 27.72,19.94 27.72,19.33 29.25,17.8 IC3.7 | v31.84,31.67 31.23,31.06 C14.1 | v21.17,6.53 20.56,5.92 18.43,5.92 TP_3V3.TP | v34.12,31.98 34.28,31.98 | v41.14,7.44 41.73,8.04 | 41.73,8.04 41.75,8.05 41.73,8.04 | v16.45,26.64 15.68,25.88
  Bottom 0.152: v32.3,19.5 32.8,20 34,20 v34.5,20 | v31.5,20.1 30.5,20.1 v30.2,19.8 | U1.P$W1 27.6,21.3 v27.6,20 27.72,19.94 27.72,19.33 28.18,18.87 28.18,17.35 | 31.84,28.02 32.14,28.02 33.36,26.8 | 31.84,28.02 v28.49,28.02 | 33.36,26.8 34.43,25.73 34.43,20.09 v34.5,20 | 33.36,26.8 33.52,26.8 v34.58,27.86 34.12,28.32 v34.12,31.98 | 28.18,17.35 v28.18,17.04 28.18,17.35 | 31.84,28.02 v31.84,31.67 31.38,32.13 25.44,32.13 24.07,30.76 24.07,28.78 24.98,27.86 24.98,26.95 24.68,26.64 v16.45,26.64 | 28.18,17.35 25.74,17.35 25.44,17.04 25.44,16.43 27.12,14.76 27.12,14 21.17,8.05 v21.17,6.53 24.37,6.53 v27.12,3.78 | v41.14,7.44 40.68,6.98 37.94,6.98 34.58,10.34 34.58,19.94 v34.5,20
  other vias: 28.45,22.15
DEC4_6  (via drill 0.35)
  Top 0.152: U1.P$B5 30.01,26.95 30.01,27.25 30.47,27.71 32.6,27.71 34.12,29.23 34.12,29.54 L3.2 34.12,29.69 33.52,30.3 | 33.52,30.3 32.6,30.3 31.99,29.69 31.53,29.69 C16.1 | 36.56,25.58 37.63,25.58 40.83,28.78 40.83,31.06 40.37,31.52 35.95,31.52 35.8,31.67 34.89,31.67 34.43,31.22 C15.1 34.28,31.06 33.52,30.3 | 36.56,25.58 34.89,25.58 U1.P$E24 | v36.56,27.71 35.5,28.78 35.5,28.93 C10.1 | 36.56,25.58 v36.56,25.27
  Bottom 0.152: v36.56,25.27 v36.56,27.71
DN  (via drill 0.35)
  Top 0.152: J4.A7 22.85,28.93 22.85,28.32 23,28.17 23.61,28.17 23.76,28.32 23.76,28.93 J4.B7 23.76,29.08 23.76,29.54 v22.85,30.45 | v8.52,32.59 7.3,32.59 D3.1 | v21.17,32.13 v17.82,32.13
  Bottom 0.152: v8.52,32.59 15.23,32.59 15.68,32.13 v17.82,32.13 | v22.85,30.45 v21.17,32.13
DP  (via drill 0.35)
  Top 0.152: J4.A6 23.15,29.08 23.15,29.69 23,29.84 22.54,29.84 22.24,29.54 22.24,29.08 J4.B6 22.24,28.93 22.24,27.56 20.71,26.03 v20.26,26.03 | v8.52,29.39 7.3,30.61 D3.3
  Bottom 0.152: v8.52,29.39 12.79,29.39 16.14,26.03 v20.26,26.03
EPD_3V3  (via drill 0.35)
  Top 0.152: 10.35,15.98 10.5,15.82 J1.16 10.66,15.82 v11.57,15.82 | 10.35,15.98 9.44,16.89 9.44,17.2 EPD_C5.2 | 10.35,15.98 10.5,16.13 J1.15 | 13.09,11.1 C1-EP-DR.1 | 13.09,11.1 13.86,11.1 14.16,10.79 14.16,8.81 DMG2305UX-7.3 | 13.09,11.1 v11.57,12.62 | v7.76,7.9 5.93,7.9 5.02,8.81 L5.2
  Bottom 0.152: v11.57,15.82 v11.57,12.62 11.57,11.71 v7.76,7.9
GDR
  Top 0.152: R2_EP_DR.2 9.44,22.99 10.05,22.99 10.2,22.83 10.5,22.83 J1.2 10.66,22.83 11.88,22.83 14.47,25.43 Q3.1
GND  (via drill 0.15, 0.35)
  Top 0.152: 39.41,21.41 C22.2 38.7,22.07 37.63,22.07 C4.2 37.48,22.07 36.41,22.07 C3.2 | 39.41,21.41 41.56,19.25 J2.5 J2.3 | R2_EP_DR.1 9.22,22.5 | 9.22,22.5 8.5,22.5 8.5,23.5 8.5,23.52 J1.MP1 8.22,23.9 8.22,24.97 7.3,25.88 3.19,25.88 EPD_C9.1 3.04,26.03 2.73,26.03 1.36,27.41 1.36,27.71 1.82,28.17 R_TYPE_SEL.1 1.97,28.17 2.73,28.17 3.34,28.78 C39.2 3.49,28.78 4.41,28.78 4.71,28.47 | J1.MP2 8.04,10.96 8.5,10.5 8.5,8.17 EPD_C11.1 8.98,7.75 8.98,7.14 10.66,5.46 EPD_C12.1 10.81,5.31 11.42,5.92 11.42,6.38 13.4,8.36 13.4,8.51 | 9.22,22.5 9.22,22.11 EPD_C2.1 8.83,21.46 8.83,21.16 10.2,19.79 | C34.1 32.75,7.9 | 32.75,7.9 33.17,8.31 34.12,8.31 | 34.12,8.31 C38.1 | J4.A12_B1 19.25,28.98 J4.SH4 18.58,29.54 16.9,29.54 15.68,28.32 | J4.A1_B12 26.75,28.98 J4.SH3 27.42,29.54 27.72,29.23 29.1,29.23 C5.2 29.25,29.23 30.47,30.45 30.47,30.61 | IC2.B1 23.66,9.34 23.5,9.5 23.5,11 24.5,11 24.56,11.06 U3.6 24.68,12.32 24.68,13.23 U3.9 | IC9.C3 IC9.C2 IC9.C1 IC9.B1 24.22,18.87 24.22,19.63 24.83,20.24 25.13,20.24 26.66,18.72 26.66,18.41 | R3.1 33.06,13.08 34.43,11.71 C20.2 34.43,11.56 34.43,9.27 34.73,8.97 34.73,8.36 34.58,8.2 34.12,8.2 | 34.28,5 34.73,5 35.34,4.39 35.34,4.09 SW_DN.1 35.5,3.94 35.95,3.94 37.63,2.26 38.39,2.26 TP_GND.TP | 34.28,5 C29.1 34.28,5 | 34.12,8.2 34.12,6.38 34.28,6.22 34.28,5 | 34.12,8.2 34.12,8.31 | 34.12,8.31 34.12,8.36 34.12,8.31 | 28.79,12.47 28.79,13.08 27.88,14 C21.2 27.88,14.15 26.66,15.37 | 28.79,12.47 C27.1 28.79,12.47 | 26.66,15.37 26.66,18.41 | 25.59,14.3 25.65,14.35 | 25.65,14.35 26.66,15.37 | 24.98,13.38 24.83,13.38 U3.9 | 12.64,16.74 12.64,18.26 SJ1.1
  Top 0.152: 12.64,16.74 12.64,14.6 D4.1 | 17.51,16.74 17.51,17.35 C33.2 | 17.51,16.74 19.8,14.45 21.78,14.45 EPD_C6.1 21.93,14.3 23.91,14.3 U3.4 24.07,14.15 24.07,13.84 24.52,13.38 24.68,13.38 U3.9 | 17.51,16.74 12.64,16.74 | 32.75,7.9 30.62,10.03 30.16,10.03 28.79,11.4 28.79,12.47 | 32.75,7.9 | 10.2,19.79 10.5,19.79 J1.8 | J1.17 10.5,15.37 10.05,15.37 8.83,16.59 8.83,17.2 EPD_C5.1 8.83,17.35 8.83,18.41 10.2,19.79 | 4.1,31.98 4.1,31.06 4.71,30.45 EPD_C7.1 4.86,30.3 5.32,29.84 5.32,29.08 4.71,28.47 | 4.1,31.98 4.1,32.59 C42.2 | 6.39,31.67 5.63,31.67 5.32,31.98 4.1,31.98 | 6.39,31.67 7.15,31.67 D3.2 | 4.71,28.47 5.47,27.71 6.54,27.71 7.15,28.32 EPD_C8.1 | R1_USB.1 23.46,26.8 22.24,26.8 21.78,26.34 C18.1 | IC1.D2 25.44,22.99 24.52,23.9 24.37,23.9 23.91,24.36 R9.1 23.91,24.51 23.46,24.97 23,24.97 | 23,24.97 C37.1 23,24.97 | 23,24.97 22.85,24.97 21.93,25.88 21.93,26.19 C18.1 | C24.1 15.84,28.17 17.06,26.95 17.06,26.8 17.36,26.49 C43.2 17.36,26.34 16.9,25.88 16.9,24.97 17.06,24.82 19.95,24.82 21.32,26.19 21.78,26.19 C18.1 | 14.62,32.28 14.77,32.44 14.77,33.65 R2_USB.2 | 14.62,32.28 14.31,31.98 14.16,31.98 C23.1 14.01,31.98 14.01,29.69 | 10.5,28.32 11.27,28.32 12.33,29.39 EPD_C10.1 | 10.5,28.32 C6.2 10.5,28.32 | 10.5,28.32 9.89,28.93 8.98,28.93 8.83,28.78 8.83,26.64 9.44,26.03 10.35,26.03 10.5,26.19 10.5,26.34 10.81,26.64 EPD_C1.1 | 14.01,29.69 13.7,29.39 12.48,29.39 EPD_C10.1 | 15.68,28.32 15.38,28.32 14.01,29.69 | 15.68,28.32 C24.1 | 14.62,32.28 16.14,32.28 17.51,33.65 18.58,33.65 J4.SH2 18.73,33.81 27.27,33.81 J4.SH1 27.42,33.65 28.33,32.74 28.64,32.74 | 15.68,28.32 C24.1
  Top 0.152: 6.39,31.67 6.39,33.05 6.54,33.2 10.5,33.2 10.66,33.05 10.66,31.22 12.33,29.54 EPD_C10.1 | C9.2 40.07,33.35 40.37,33.35 41.44,32.28 TP_BAT_GND.TP 41.44,32.13 v41.44,30.61 41.44,28.93 40.53,28.02 40.53,22.53 39.46,21.46 39.41,21.41 | C7.2 33.21,33.65 33.21,32.74 C8.2 33.06,32.59 33.06,31.67 31.53,30.15 C16.2 31.38,30.15 30.93,30.15 30.47,30.61 | 30.47,30.61 30.16,30.91 C14.2 30.01,30.91 28.94,30.91 28.64,31.22 28.64,32.74 | C10.2 36.11,28.93 36.72,28.93 X1.2 36.87,28.93 38.09,30.15 | C15.2 35.34,31.06 35.5,30.91 35.95,30.91 C13.2 36.11,30.91 36.26,30.91 36.41,31.06 37.33,31.06 38.09,30.3 | 38.09,30.15 39,29.23 39.46,29.23 C2.2 | 38.09,30.15 X1.4 | 38.09,30.3 38.85,31.06 | 38.85,31.06 39,31.22 40.22,31.22 40.37,31.06 40.37,30.76 C11.2 | 38.09,30.3 X1.4 | 38.09,30.3 X1.4 | 38.09,30.15 X1.4 | 37.94,32.89 37.48,32.89 C12.2 | 37.94,32.89 38.09,33.05 38.09,33.35 C1.2 | 28.64,32.74 29.55,32.74 C17.1 | 37.94,32.89 37.94,32.74 v38.09,32.59 | v39,30.91 38.85,31.06 | 30.01,25.73 30.16,25.88 30.16,26.64 U1.P$B7 | 30.01,25.73 U1.P$74 | 33.52,25.58 33.67,25.43 34.43,25.43 U1.P$F23 | 33.52,25.58 U1.P$74 | 29.86,23.29 29.86,22.22 U1.P$87 30.01,22.22 31.08,22.22 U1.P$88 | 29.86,23.29 U1.P$74 | 29.86,23.29 U1.P$83 | 29.86,23.29 U1.P$74 | 30.01,25.73 U1.P$75 | 30.01,25.73 U1.P$74 | U1.P$84 31.08,23.44 30.93,23.6 U1.P$74 | 33.36,22.22 32.45,22.22 U1.P$89 | 33.36,22.22 U1.P$74 | U1.P$74 U1.P$85 32.45,23.29 33.36,23.29 U1.P$86 | U1.P$80 31.08,24.51 U1.P$74 | U1.P$81 U1.P$74 | 33.36,22.22 U1.P$90 | 33.36,22.22 U1.P$74 | U1.P$82 33.36,24.51 32.91,24.97 U1.P$74 | U1.P$76 31.08,25.58 30.62,25.12 U1.P$74 | U1.P$77 32.45,25.58 32.45,25.27 32.75,24.97 U1.P$74
  Top 0.152: 33.52,25.58 U1.P$78 | 33.52,25.58 U1.P$74 | C32.1 30.93,6.83 30.93,4.55 C19.2 30.77,4.39 v25.44,4.39 24.22,4.39 | 24.22,4.39 24.37,4.24 24.37,3.94 SW_ENT.1 | 24.22,4.39 23.61,5 23.3,5 C31.1 | 13.4,8.51 13.4,10.34 C1-EP-DR.2 | 14.31,5 14.31,4.7 13.55,3.94 SW_UP.1 | 14.31,5 C30.1 14.31,5 | IC3.9 29.4,16.74 29.4,17.04 IC3.8 29.25,17.2 28.94,17.2 v27.57,18.57 | v22.54,16.74 19.19,16.74 C25.2 | v15.38,5 14.31,5 | v13.25,8.51 13.4,8.51 | U1.P$74 30.62,24.97 30.01,24.36 U1.P$79 | v26.35,18.41 26.66,18.41 | 25.65,14.35 25.58,14.29 U3.1
  Bottom 0.152: J4.SH1 27.42,33.65 35.8,33.65 36.87,32.59 v38.09,32.59 38.55,32.13 | v39,30.91 39,31.67 38.55,32.13 | v27.57,18.57 27.57,19.02 27.27,19.33 | 27.27,19.33 26.96,19.63 26.96,21.92 27.88,22.83 27.88,23.9 28.33,24.36 29.86,24.36 U1.P$79 | 27.27,19.33 v26.35,18.41 24.68,16.74 v22.54,16.74 22.54,12.17 18.58,8.2 | 18.58,8.2 16.29,5.92 | 16.29,5.92 v15.38,5 | v13.25,8.51 13.7,8.51 16.29,5.92 | v25.44,4.39 22.39,4.39 18.58,8.2 | J4.SH3 27.42,29.54 27.42,28.17 29.86,25.73 U1.P$75 | v41.44,30.61 41.44,31.06 39.76,32.74 39.15,32.74 38.55,32.13 | IC2.B1 25.12,9 25.5,9 25.78,9.28 IC2.B3
  other vias: 24.78,9.34 25.78,9.34
  pour Bottom: 1.03,-2.93 47.47,-2.93 49.92,-0.47 49.92,33.47 47.47,35.92 -1.47,35.92 -1.93,35.47 -1.93,0.03
  pour Top: 1.03,-2.93 47.47,-2.93 49.92,-0.47 49.92,33.47 47.47,35.92 -1.47,35.92 -1.93,35.47 -1.93,0.03
IMU_INT1  (via drill 0.15, 0.35)
  Top 0.152: IC3.5 30.32,18.68 29.5,19.5 v28.5,19.5
  Bottom 0.152: v28.5,19.5 28.45,19.55 U1.P$N1
  other vias: 28.45,23.65
IMU_INT2  (via drill 0.15, 0.35)
  Top 0.152: IC3.6 29.82,18.18 v29.5,18.5
  Bottom 0.152: v29.5,18.5 29.5,22.85 U1.P$P2
  other vias: 28.95,23.4
LX1
  Top 0.152: 24.22,18.11 24.22,18.41 IC9.B2 | 24.22,18.11 IC9.B3 24.22,18.11 | 24.22,18.11 24.22,17.5 22.7,15.98 18.73,15.98 18.43,16.28 18.43,17.96 19.5,19.02 L7.1
LX2  (via drill 0.15, 0.35)
  Top 0.152: L7.2 20.57,21.23 v21.2,20.6 | IC9.D2 IC9.D3
  Bottom 0.152: v21.2,20.6 21.3,20.6 IC9.D2
  other vias: 23.4,18.5
N$1
  Top 0.152: C5.1 29.15,27.15 29,27 28.8,26.8 28.8,26.5 U1.P$C1
N$2
  Top 0.152: R9.2 25.81,23.18 IC1.D1
N$3
  Top 0.152: U1.P$AC5 32,18.85 32,16 34.5,13.5 35.28,12.72 C20.1
N$4
  Top 0.152: U1.P$B3 29.25,26.64 29.25,26.8 29.71,27.25 29.71,27.41 30.77,28.47 L2.1
N$5  (via drill 0.35)
  Top 0.152: v35.65,26.49 35.5,26.64 35.04,26.64 U1.P$B24 | v35.65,27.71 35.65,28.02 35.04,28.62 35.04,29.23 35.34,29.54 36.11,29.54 36.72,30.15 X1.1 | v35.95,32.59 36.72,33.35 37.48,33.35 C1.1
  Bottom 0.152: v35.65,26.49 v35.65,27.71 35.95,28.02 v35.95,32.59
N$6
  Top 0.152: R4.2 22,21.73 22,21.2 23.3,21.2 23.39,21.11 IC9.D1
N$7  (via drill 0.35)
  Top 0.152: v33.67,27.86 32.91,27.1 U1.P$A18 | v35.19,30.15 35.95,30.15 C13.1
  Bottom 0.152: v33.67,27.86 33.67,31.52 33.52,31.67 33.52,32.28 33.82,32.59 34.43,32.59 35.19,31.83 v35.19,30.15
N$8
  Top 0.152: R2.2 21.6,21.32 21.6,21.1 21.9,20.8 23,19.7 IC9.E1
N$9
  Top 0.152: L2.2 32.14,28.47 32.14,28.78 32.91,29.54 L3.1
N$10
  Top 0.152: IC3.1 30.93,16.13 30.93,14.15 31.23,13.84 32.91,13.84 R3.2
N$11  (via drill 0.35)
  Top 0.152: v35.8,23.6 34.89,23.6 U1.P$N24 | v39.46,32.13 39.46,33.35 C9.1
  Bottom 0.152: v35.8,23.6 39.61,27.41 39.61,31.98 v39.46,32.13
N$12  (via drill 0.35)
  Top 0.152: 38.09,22.53 38.7,22.53 C22.1 38.85,22.53 v39.61,22.53 | 38.09,22.53 37.63,22.53 C4.1 | 38.09,22.53 38.09,23.6 L1.2 | v40.68,21.46 40.68,22.22 41.44,22.99 ANT1.1
  Bottom 0.152: v40.68,21.46 v39.61,22.53
N$13
  Top 0.152: U1.P$H23 34.43,24.97 34.73,24.97 34.89,25.12 35.5,25.12 36.87,23.75 L1.1 36.87,23.6 36.41,23.14 36.41,22.68 C3.1
N$14
  Top 0.152: 37.94,28.62 37.94,28.78 X1.3 37.94,28.62 | 37.94,28.62 37.94,28.17 36.87,27.1 34.43,27.1 U1.P$A23 | 37.94,28.62 39.76,28.62 39.92,28.78 39.92,29.08 C2.1
N$15
  Top 0.152: U1.P$D23 34.43,25.88 34.58,25.88 34.73,26.03 35.19,26.03 35.34,25.88 37.48,25.88 40.37,28.78 40.37,30 39.76,30.61 C11.1
N$16  (via drill 0.35)
  Top 0.152: C2-EP-DR.2 16.6,10.03 v19.5,10.03 20.71,10.03 22.09,8.66 D5.2 | v15.23,24.05 14.62,23.44 13.86,23.44 Q3.3 | v8.37,5.92 6.85,4.39 5.02,4.39 L5.1
  Bottom 0.152: v15.23,24.05 15.53,24.05 19.5,20.09 v19.5,10.03 12.48,10.03 v8.37,5.92
N$17
  Top 0.152: C2-EP-DR.1 15.53,10.18 15.53,10.49 17.51,12.47 D2.1 17.51,12.62 16.14,14 16.14,14.45 D4.2
N$18
  Top 0.152: EPD_C2.2 9.87,21.75 J1.4
N$19  (via drill 0.35)
  Top 0.152: 10.66,24.36 9.28,24.36 7.46,26.19 6.54,26.19 5.17,27.56 1.97,27.56 R_TYPE_SEL.2 | 10.66,24.36 10.96,24.66 R1_EP_DR.1 | v12.64,20.7 14.16,19.18 14.16,18.41 SJ1.2 | 10.66,24.36 v10.96,24.05
  Bottom 0.152: v12.64,20.7 10.96,22.38 v10.96,24.05
N$20
  Top 0.152: J1.5 10.66,21.31 13.4,21.31 15.84,23.75 15.84,25.27 13.86,27.25 10.35,27.25 9.89,26.8 EPD_C1.2
N$21  (via drill 0.35)
  Top 0.152: v9.74,14.76 10.5,14.76 J1.18 | v20.87,15.37 21.78,15.37 EPD_C6.2
  Bottom 0.152: v9.74,14.76 9.74,16.89 14.62,21.77 14.62,24.36 14.92,24.66 15.53,24.66 20.87,19.33 v20.87,15.37
N$22  (via drill 0.35)
  Top 0.152: v8.52,26.03 8.52,28.17 5.32,31.37 4.86,31.37 EPD_C7.2 | v9.13,19.63 9.13,19.18 8.37,18.41 8.37,15.21 9.44,14.15 10.5,14.15 J1.19
  Bottom 0.152: v8.52,26.03 8.52,20.24 v9.13,19.63
N$23  (via drill 0.35)
  Top 0.152: v11.72,20.7 11.72,17.5 12.18,17.04 12.18,15.52 11.72,15.06 11.72,14.45 11.11,13.84 10.66,13.84 J1.20 | v6.39,29.39 6.39,28.62 6.24,28.47 EPD_C8.2
  Bottom 0.152: v11.72,20.7 11.72,21.16 10.05,22.83 10.05,25.88 6.54,29.39 v6.39,29.39
N$24
  Top 0.152: R1_USB.2 23.61,27.41 23.61,27.71 24.22,28.32 24.22,28.93 J4.A5
N$25  (via drill 0.35)
  Top 0.152: v9.74,12.78 10.5,12.78 J1.22 | v13.4,30 12.79,30 12.48,30.3 EPD_C10.2
  Bottom 0.152: v9.74,12.78 9.74,13.84 9.13,14.45 9.13,18.72 9.74,19.33 9.74,25.73 6.69,28.78 6.08,28.78 5.78,29.08 5.78,29.69 6.08,30 v13.4,30
N$26  (via drill 0.15, 0.35)
  Top 0.152: C32.2 30.12,7.19 v30.1,7.2
  Bottom 0.152: v30.1,7.2 27.46,9.84 IC2.A2
  other vias: 25.28,9.84
N$27
  Top 0.152: EPD_C12.2 10.66,6.53 10.66,11.71 J1.24
N$34  (via drill 0.35)
  Top 0.152: v15.84,32.89 15.53,33.2 15.53,33.65 R2_USB.1 | v21.63,27.86 21.32,28.17 21.32,28.93 J4.B5
  Bottom 0.152: v15.84,32.89 17.97,32.89 19.34,31.52 20.71,31.52 21.63,30.61 v21.63,27.86
OUT+
  Top 0.152: IC2.A3 25.9,9.88 28.33,9.88 28.79,9.42 TP_OP.TP
OUT-
  Top 0.152: IC2.C3 25.9,8.81 28.64,6.07 TP_ON.TP
P0.00/XL1  (via drill 0.35)
  Top 0.152: X2.1 27.16,26.23 | 27.16,26.23 27.29,26.1 27.8,26.1 28.1,25.82 28.85,25.82 U1.P$D2 | v29.25,31.52 30.01,32.28 30.01,32.59 C17.2 | v27.12,26.19 27.16,26.23
  Bottom 0.152: v29.25,31.52 25.29,31.52 24.37,30.61 24.37,28.93 v27.12,26.19
P0.01/XL2
  Top 0.152: U1.P$F2 28.85,25.5 26.75,25.5 X2.2 26.05,24.97 25.74,24.97 24.52,26.19 22.54,26.19 C18.2
P0.13/1.5D  (via drill 0.35)
  Top 0.152: C30.2 13.86,5 13.4,5 R5.1 13.25,5 12.33,5 11.88,5.46 11.88,6.38 13.09,7.59 v13.55,7.59 | v9.28,5.92 9.59,5.61 9.74,5.61 10.2,5.16 10.2,4.39 10.5,4.09 SW_UP.2
  Bottom 0.152: v13.55,7.59 10.96,7.59 v9.28,5.92
P0.14/1.5D
  Top 0.152: 22.54,5 22.39,5 21.63,4.24 21.63,3.94 SW_ENT.2 | 22.54,5 22.85,5 C31.2 | 22.54,5 23,5.46 23.61,5.46 24.07,5 24.52,5 R8.1
P1.01/1.6C
  Top 0.152: R_PWR_EPD.1 12.48,6.38 13.09,6.38 13.25,6.53 DMG2305UX-7.1
P1.02/1.6C
  Top 0.152: C29.2 33.82,5 33.82,5.31 R7.1 33.67,5.31 33.36,5 33.21,5 32.6,4.39 32.6,4.09 SW_DN.2
PMIC_INT
  Top 0.152: U1.P$T2 27.75,21.7 IC1.A1
PREVGH  (via drill 0.35)
  Top 0.152: v5.02,26.8 3.19,26.8 EPD_C9.2 | v9.13,13.54 9.89,13.54 10.2,13.23 10.5,13.23 J1.21 10.66,13.23 12.18,13.23 14.47,10.95 14.47,10.03 15.84,8.66 18.58,8.66 D5.1
  Bottom 0.152: v5.02,26.8 6.39,26.8 8.22,24.97 8.22,14.45 v9.13,13.54
PREVGL  (via drill 0.35)
  Top 0.152: EPD_C11.2 9.89,7.9 9.89,11.86 10.2,12.17 10.5,12.17 J1.23 10.66,12.17 11.11,12.17 11.57,11.71 v11.57,10.79 | v18.88,12.47 21.02,12.47 D2.2
  Bottom 0.152: v18.88,12.47 13.25,12.47 v11.57,10.79
RESE  (via drill 0.35)
  Top 0.152: R1_EP_DR.2 10.5,24.82 10.5,24.97 10.96,25.43 v12.03,25.43 13.09,25.43 Q3.2 | v12.03,22.22 10.66,22.22 J1.3
  Bottom 0.152: v12.03,25.43 v12.03,22.22
RESET
  Top 0.152: J2.6 40.3,18.14 TP_RESET.TP 35.5,19.72 34.98,19.2 34.9,19.2 33.65,19.2 33.13,19.72 U1.P$AC13
SCL/1.4C  (via drill 0.15, 0.35)
  Top 0.152: U3.7 25.06,11.46 25,11.4 24.9,11.3 24.9,11.1 24.9,10.9 v24.2,10.2
  Bottom 0.152: v24.2,10.2 24.2,9.42 IC2.C1
  other vias: 24.78,8.84
SCL/2.4C  (via drill 0.35)
  Top 0.152: U1.P$M2 27.15,22.1 IC1.B1 | v23.4,21.8 R4.1 22.39,21.92 22.39,22.38 20.87,23.9 18.73,23.9 v16.75,21.92 | R17.2 43.27,5.92 43.27,5.16 40.98,2.87 39.92,2.87 37.17,5.61 37.17,5.92 TP_SCL.TP 37.02,6.07 v35.95,7.14 | v30.32,14 30.32,16.13 IC3.12
  Bottom 0.152: v23.4,21.8 23.7,22.1 IC1.B1 | v30.32,14 30.32,12.78 33.67,9.42 | v35.95,7.14 33.67,9.42 | v16.75,21.92 10.35,15.52 10.35,11.4 7.15,8.2 7.15,6.22 9.89,3.48 26.5,3.48 26.81,3.17 27.42,3.17 33.67,9.42
  other vias: 25.8,22.1
SDA/1.4C  (via drill 0.15, 0.35)
  Top 0.152: U3.8 26,11.88 v26,11
  Bottom 0.152: v26,11 25.28,10.28 IC2.B2
  other vias: 25.28,9.34
SDA/2.4C  (via drill 0.35)
  Top 0.152: IC1.C1 26.5,22.5 | 26.5,22.5 26.8,22.5 U1.P$L1 | v31.53,14.45 31.53,16.28 31.23,16.59 30.93,16.59 IC3.2 | v31.53,12.62 31.53,12.17 30.77,11.4 TP_SDA.TP | R18.2 15.84,20.85 17.06,20.85 19.65,23.44 19.95,23.44 R2.1 20.1,23.44 20.41,23.44 v21.02,22.83 | v26.5,22.83 26.5,22.53 26.5,22.5 | v26.05,16.74 26.05,17.5 v25.29,18.26
  Bottom 0.152: v31.53,12.62 v31.53,14.45 30.77,14.45 28.79,16.43 26.35,16.43 v26.05,16.74 | v21.02,22.83 22.7,22.83 | 22.7,22.83 v26.5,22.83 | v25.29,18.26 22.7,20.85 22.7,22.83
SWDCLK  (via drill 0.35)
  Top 0.152: J2.4 37.9,12.9 TP_SWDCLK.TP 35.34,15.67 v36.87,17.2 | v36.87,21.31 36.56,21.62 35.04,21.62 U1.P$AA24
  Bottom 0.152: v36.87,17.2 v36.87,21.31
SWDIO  (via drill 0.35)
  Top 0.152: TP_SWDIO.TP 40.3,4.38 40.3,7.59 | 40.3,7.59 J2.2 | v36.26,20.55 35.65,21.16 35.04,21.16 U1.P$AC24 | v40.22,7.59 40.3,7.59
  Bottom 0.152: v36.26,20.55 36.26,14.45 35.95,14.15 35.95,9.42 37.78,7.59 v40.22,7.59
SWO  (via drill 0.35)
  Top 0.152: v35.34,20.55 35.04,20.55 34.58,21 34.28,21 33.97,20.7 U1.P$AD22 | v35.34,18.57 34.43,18.57 33.82,17.96 TP_SWO.TP
  Bottom 0.152: v35.34,18.57 v35.34,20.55
VBAT/1.2A  (via drill 0.35)
  Top 0.152: v26.5,14.3 28.33,12.47 C27.2 | v25.59,15.21 25.13,14.76 25.13,14.5 | 25.13,14.3 25.13,14.5 | v9.44,5 7,2.56 TP_VBAT.TP | v14.31,6.83 15.38,7.9 v19.8,7.9 | U3.3 | 25.13,14.5 25.13,14.38 U3.2 U3.3
  Bottom 0.152: v25.59,15.21 26.35,14.45 | 26.35,14.45 v26.5,14.3 26.35,14.45 | v9.44,5 12.48,5 v14.31,6.83 | 26.35,14.45 v19.8,7.9
VBAT/2.5C
  Top 0.152: IC1.C2 23,22.5 C37.2
VBUS/1.5D  (via drill 0.35)
  Top 0.152: C43.1 19.08,27.06 | 19.08,27.06 20.6,28.57 J4.A9_B4 20.6,30.1 23,32.5 25.4,30.1 J4.A4_B9 | v3.49,31.37 3.64,31.52 3.64,32.59 C42.1 | v8.52,31.37 9.59,31.37 9.74,31.52 D3.5 | v18.43,27.71 19.04,27.1 19.08,27.06
  Bottom 0.152: v3.49,31.37 v8.52,31.37 12.94,31.37 13.09,31.52 14.62,31.52 v18.43,27.71
VBUS/2.6D
  Top 0.152: U1.P$AD2 26.96,20.65 | 26.96,20.65 25.85,20.65 25.5,21 25.39,21.11 IC1.A2 | C38.2 34.28,8.66 34.28,8.97 32.14,11.1 32.14,12.93 31.69,13.38 29.71,13.38 29.1,14 C21.1 28.94,14.15 26.96,16.13 26.96,20.65 | 26.96,20.65 26.96,20.7 26.96,20.65
VREG  (via drill 0.35)
  Top 0.152: v25,19.5 24.59,19.09 IC9.A1 24.68,18.87 24.68,18.57 | 13.4,32.44 12.18,32.44 12.03,32.59 TP_VREG.TP | 13.4,32.44 14.01,32.44 C23.2 | 24.68,18.57 IC9.A2 24.68,18.57 | 24.68,18.57 24.68,18.11 IC9.A3 | v24.37,27.25 v25.44,26.19 | v17.36,27.56 16.75,28.17 C24.2 | v4.71,29.54 4.41,29.84 3.49,29.84 C39.1 | v13.4,30.91 13.4,32.44
  Bottom 0.152: v25,19.5 25,21.71 25.1,21.8 | 25.1,21.8 IC1.B2 | v25.44,26.19 27.12,24.51 27.12,22.53 26.05,21.46 25.44,21.46 25.13,21.77 25.1,21.8 | v24.37,27.25 18.88,27.25 18.73,27.1 17.82,27.1 v17.36,27.56 14.31,30.61 13.4,30.61 | v4.71,29.54 5.17,29.54 6.24,30.61 13.4,30.61 | 13.4,30.61 v13.4,30.91
  other vias: 25.4,22.1